# EAGLE board ruido_v0_sensor (EAGLE 5.06)
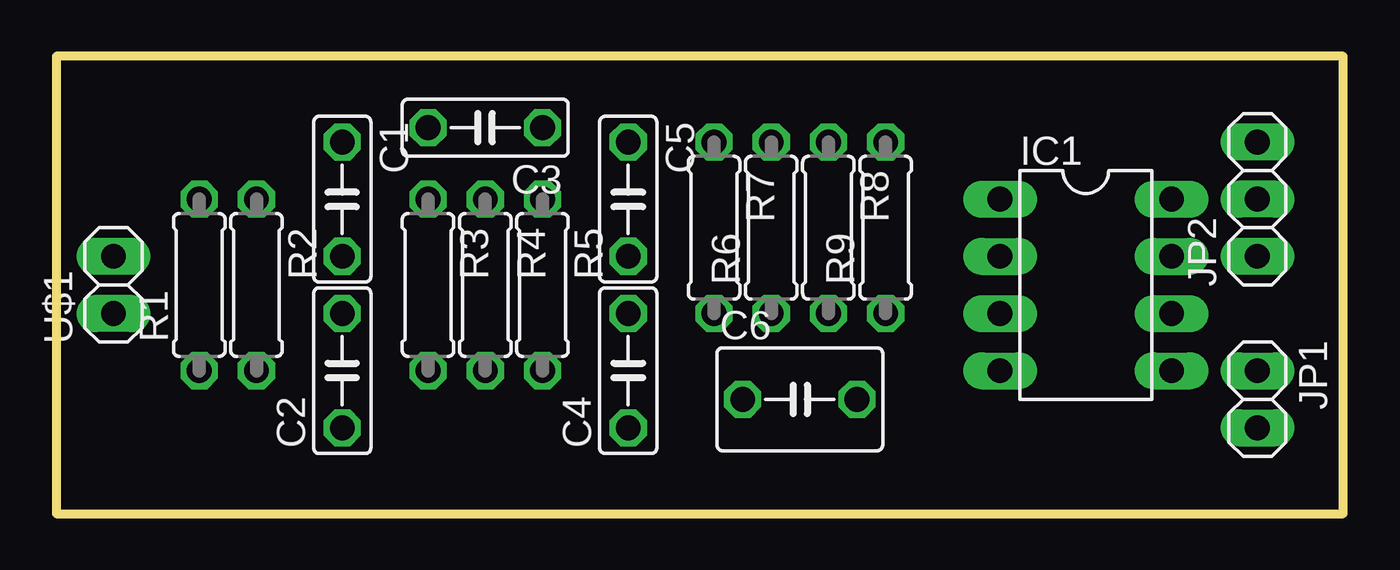
[diagram p0: board, top side]
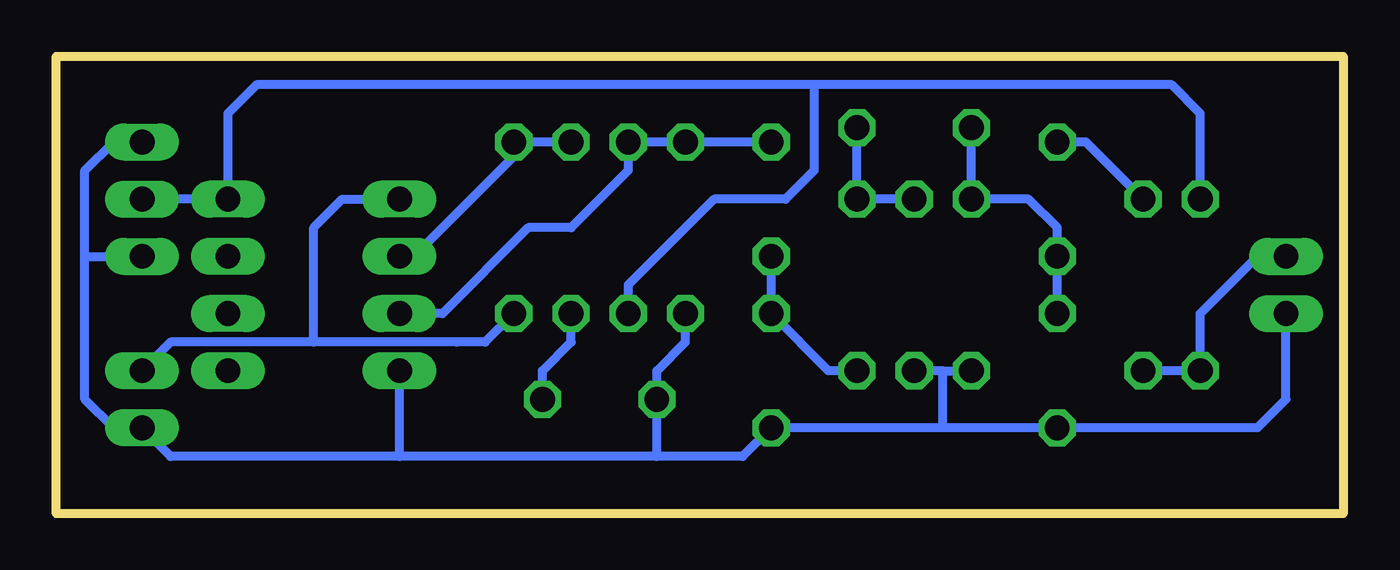
[diagram p1: board, bottom side, seen from below]

Size 57.15 x 20.32 mm. Coordinates in mm from the lower left corner, seen from the top.
Outline: 0,0 57.15,0 57.15,20.32 0,20.32 0,0
Copper layers (1*16): Top 0.035mm / dielectric 1.5mm / Bottom 0.035mm
Design rules "default": minimum track width 10mil, minimum drill 24mil, track to track 8mil, track to pad 8mil, pad to pad 8mil, via to via 8mil, smd to smd 8mil, copper to edge 40mil, drill to drill 8mil, minimum pad ring 10mil, minimum via ring 8mil, stop-mask expansion 4mil, vias tented up to drill 0mil, thermal gap 10mil

## Footprints (pad centres in the part's own frame; a part is rotated, then mirrored left to right if it is on the bottom)
C050-025X075 = drill 1.1 octagon: 1 -2.54,0; 2 2.54,0
C050-045X075 = drill 1.1 octagon: 1 -2.54,0; 2 2.54,0
DIL08 = drill 1.1 long: 1 -3.81,-3.81; 2 -1.27,-3.81; 3 1.27,-3.81; 4 3.81,-3.81; 5 3.81,3.81; 6 1.27,3.81; 7 -1.27,3.81; 8 -3.81,3.81
1X02 = drill 1.1 long: 1 -1.27,0; 2 1.27,0
1X03 = drill 1.1 long: 1 -2.54,0; 2 0,0; 3 2.54,0
0207/7 = drill 1.1 octagon: 1 -3.81,0; 2 3.81,0

## Placement (x,y rotation side)
C1  220nF  [C050-025X075]  12.7,13.97 270 top
C2  27nF  [C050-025X075]  12.7,6.35 90 top
C3  330nF  [C050-025X075]  19.05,17.14 180 top
C4  1.8nF  [C050-025X075]  25.4,6.35 90 top
C5  47nF  [C050-025X075]  25.4,13.97 270 top
C6  1uF  [C050-045X075]  33.02,5.08 0 top
IC1  LM358N  [DIL08]  45.72,10.16 270 top
JP1  [1X02]  53.34,5.08 270 top
JP2  [1X03]  53.34,13.97 90 top
R1  2k2  [0207/7]  6.35,10.16 90 top
R2  330  [0207/7]  8.89,10.16 270 top
R3  1k8  [0207/7]  16.51,10.16 270 top
R4  1k8  [0207/7]  19.05,10.16 270 top
R5  10k  [0207/7]  21.59,10.16 270 top
R6  100k  [0207/7]  31.75,12.7 90 top
R7  100k  [0207/7]  29.21,12.7 270 top
R8  1k  [0207/7]  34.29,12.7 270 top
R9  18k  [0207/7]  36.83,12.7 90 top
U$1  MIC  [1X02]  2.54,10.16 90 top

## Library data of the parts
C1-C6 IC1 JP1 JP2 R1-R9 U$1 = ruido

## Nets
+5V: IC1.8 JP2.2 R1.2 R6.1
GND: C2.1 C4.1 C6.1 IC1.4 JP1.2 JP2.1 JP2.3 R3.2 R4.2 R7.2 U$1.1
N$1: R1.1 R2.2 U$1.2
N$2: C1.1 R2.1
N$3: C1.2 C2.2 C3.2 R3.1
N$6: C3.1 R4.1 R5.1
N$7: C4.2 C5.2 R5.2
N$8: C5.1 IC1.3 R6.2 R7.1
N$9: C6.2 R8.2
N$10: IC1.2 R8.1 R9.2
N$11: IC1.1 JP1.1 R9.1

## Tracks (layer width: path | path; a pad name or v marks a point on that pad's centre or on a via)
+5V
  Bottom 0.406: JP2.2 IC1.8 49.53,17.78 48.26,19.05 23.5,19.05 | R1.2 6.35,17.78 7.62,19.05 23.5,19.05 | R6.1 31.75,10.16 27.94,13.97 24.77,13.97 23.5,15.24 23.5,19.05
GND
  Bottom 0.406: JP2.3 54.61,16.51 55.88,15.24 55.88,11.43 | 55.88,11.43 55.88,5.08 54.61,3.81 JP1.2 52.07,2.54 41.91,2.54 | 55.88,11.43 JP2.1 | 30.48,2.54 C6.1 30.48,6.35 29.21,7.62 R7.2 | 30.48,2.54 41.91,2.54 | 41.91,2.54 IC1.4 | 30.48,2.54 26.67,2.54 C4.1 17.78,3.81 | 17.78,3.81 C2.1 3.81,3.81 2.54,5.08 U$1.1 | 17.78,6.35 R4.2 | 17.78,6.35 R3.2 | 17.78,3.81 17.78,6.35
N$1
  Bottom 0.406: U$1.2 3.81,11.43 6.35,8.89 R1.1 R2.2
N$2
  Bottom 0.406: R2.1 11.43,16.51 C1.1
N$3
  Bottom 0.406: C2.2 C1.2 12.7,12.7 13.97,13.97 R3.1 C3.2
N$6
  Bottom 0.406: R4.1 R5.1 C3.1
N$7
  Bottom 0.406: R5.2 22.86,6.35 C4.2 C5.2
N$8
  Bottom 0.406: IC1.3 40.01,8.89 36.2,12.7 34.29,12.7 31.75,15.24 R6.2 R7.1 C5.1
N$9
  Bottom 0.406: C6.2 35.56,6.35 34.29,7.62 R8.2
N$10
  Bottom 0.406: IC1.2 41.27,11.43 36.83,15.88 R9.2 | R9.2 R8.1 R9.2
N$11
  Bottom 0.406: 45.72,7.62 52.07,7.62 JP1.1 | IC1.1 44.45,13.97 45.72,12.7 45.72,7.62 | 45.72,7.62 39.37,7.62 38.1,7.62 R9.1